# Altium PCB newae_pcbtemplate.PcbDoc
Units mil, origin at the board's own origin, x right, y up, seen from the top; angles counter-clockwise.
Board outline 2055 x 2540 mil, 2 copper layers (Top Layer, Bottom Layer); 22 components, 30 nets, 162 pads, 93 vias.
Unrouted connection lines stored in the file: 1.
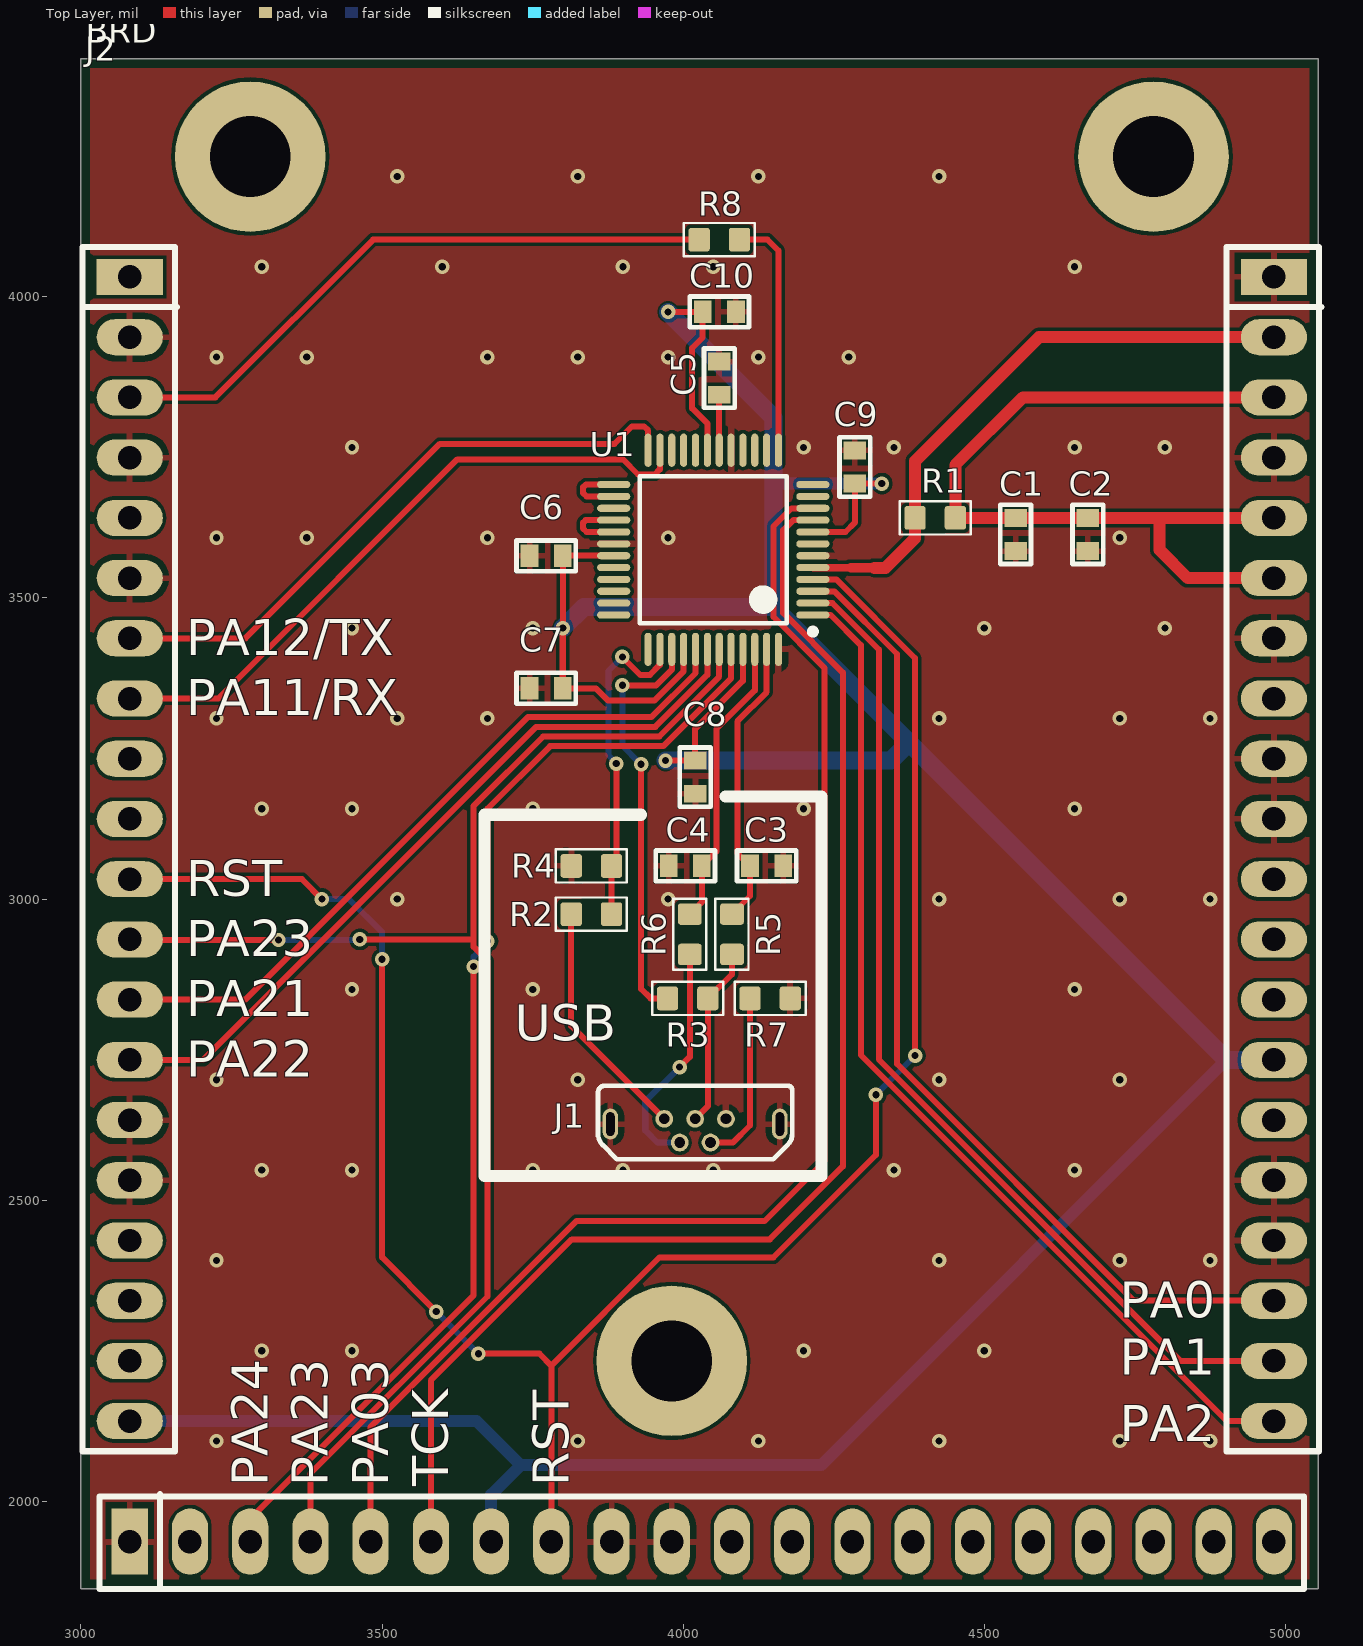
[diagram p0: Top Layer view]
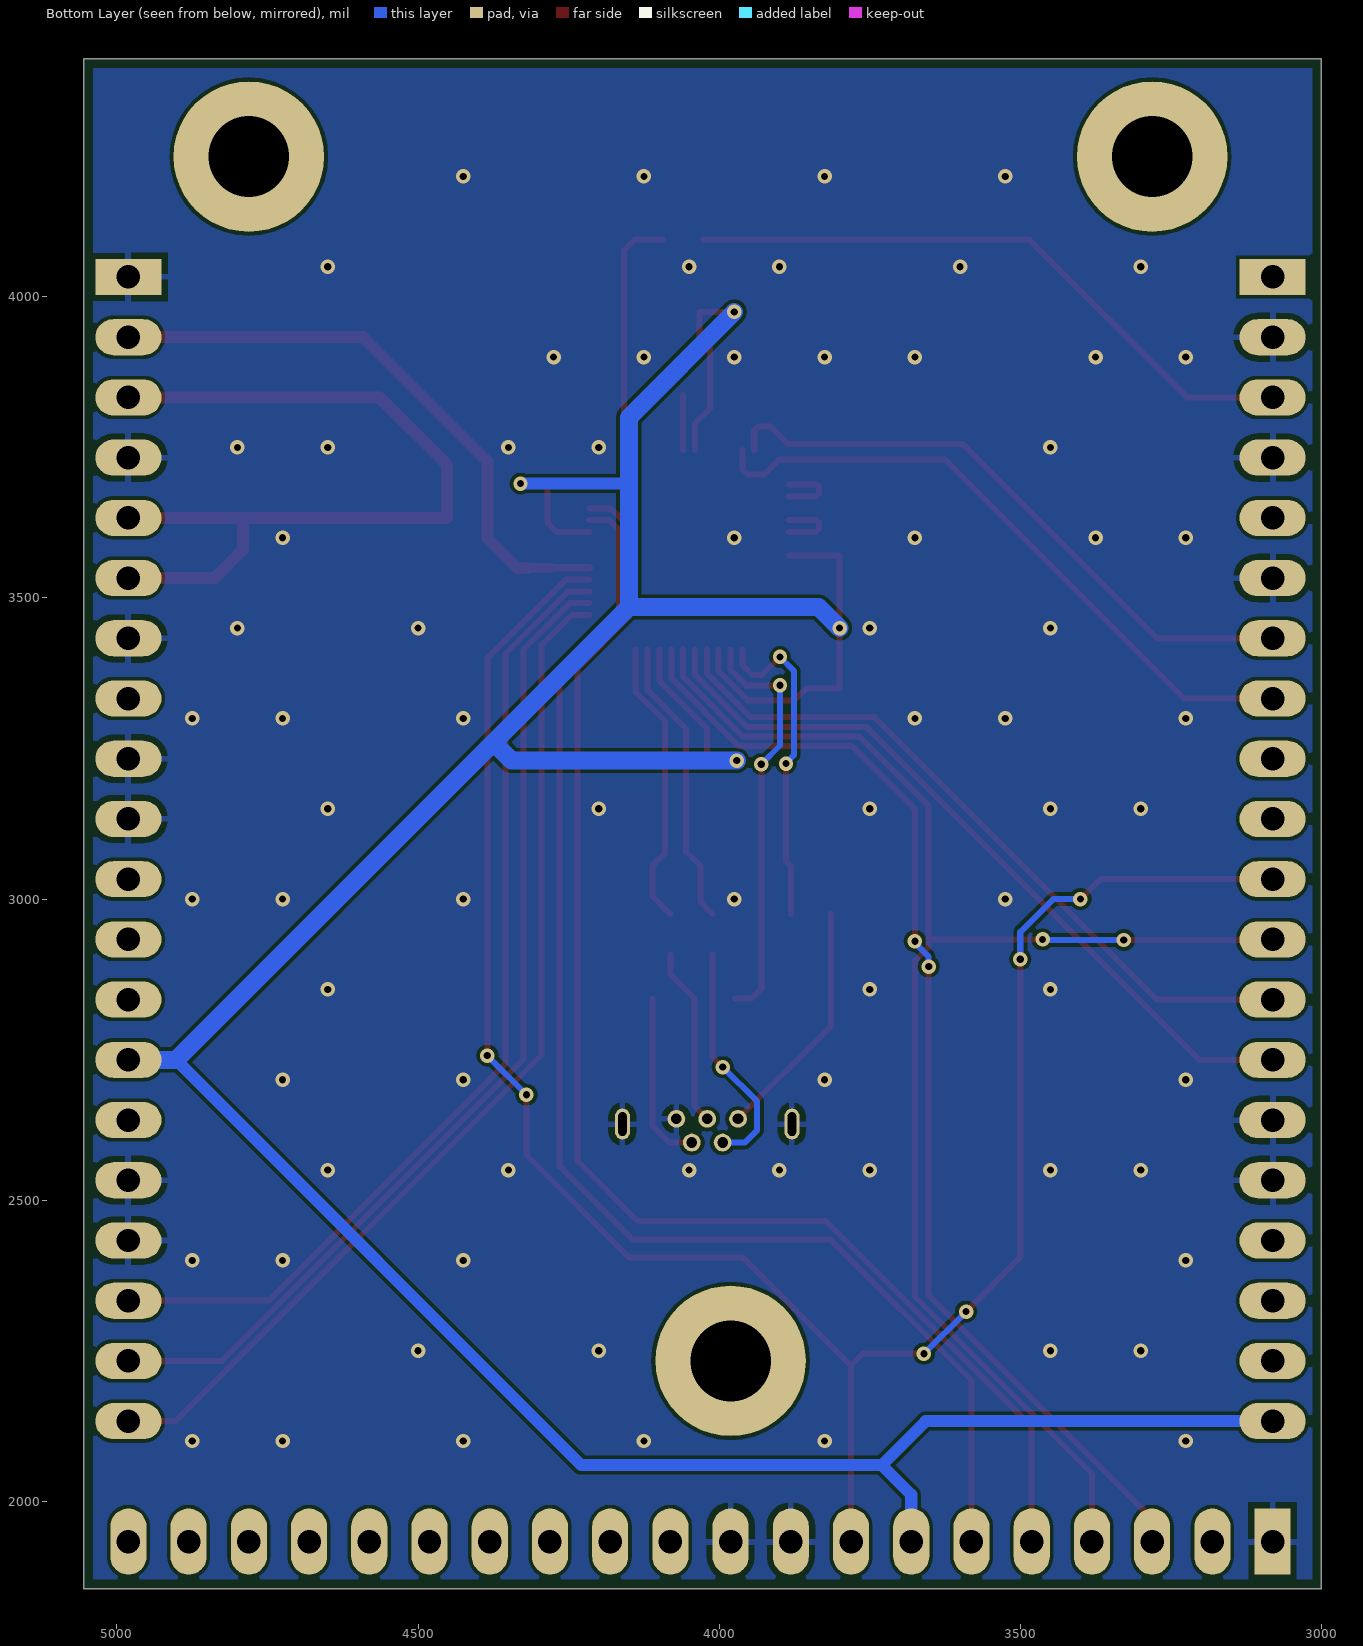
[diagram p1: Bottom Layer view, seen from below]

## Layer stack, top to bottom
Top Solder: solder mask 0.4, Solder Resist, Dk 3.5
Top Layer: signal copper 1.4
Dielectric 1: dielectric 12.6, FR-4, Dk 4.8
Bottom Layer: signal copper 1.4
Bottom Solder: solder mask 0.4, Solder Resist, Dk 3.5

## Board outline
3000,1855 5055,1855 5055,4395 3000,4395

## Design rules (kind name [scope] priority, off if disabled: settings)
BoardOutlineClearance [All] p1: gap=15 ignorepadtopadclearanceinfootprint=FALSE except(0: Arc-SplitContinuation Track-SplitContinuation SMDPad-SplitContinuation THPad-SplitContinuation Via-SplitContinuation Fill-SplitContinuation Poly-SplitContinuation Region-SplitContinuation Text-SplitContinuation)
Clearance [All] p1: gap=6 ignorepadtopadclearanceinfootprint=FALSE except(0: Arc-Hole Track-Hole SMDPad-Hole THPad-Hole Via-Hole Fill-Hole Poly-Hole Region-Hole Text-Hole)
HoleSize [All] p1: absolutevalues=TRUE maxlimit=200 minlimit=1 maxpercent=80.000 minpercent=20.000
MinimumSolderMaskSliver [All] p1: minsoldermaskwidth=5
PlaneConnect PlaneConnect_viaDirect [IsVia] p1: planeconnectstyle=Direct reliefexpansion=20 reliefentries=4 reliefconductorwidth=10 reliefairgap=10
PlaneConnect [All] p2: planeconnectstyle=Relief reliefexpansion=20 reliefentries=4 reliefconductorwidth=10 reliefairgap=10
PolygonConnect PolygonConnect_viaDirect [All vs isVia] p1: connectstyle=Direct reliefconductorwidth=10 reliefentries=4 polygonreliefangle="90 Angle" airgapwidth=10
PolygonConnect [All] p2: connectstyle=Relief reliefconductorwidth=10 reliefentries=4 polygonreliefangle="90 Angle" airgapwidth=10
RoutingVias [All] p1: holewidth=28 width=50 viastyle="Through Hole" minholewidth=28 minwidth=50 maxholewidth=28 maxwidth=50 useviatemplates=TRUE viatemplateguid#1={6D840749-F907-4D16-8989-C3B63D66B6A2} viatemplateguid#2={698B4A5D-BA78-483D-BBA4-95D6EA621E6A} viatemplateguid#3={FD094B6F-365A-486E-9523-000277BBDB43} viatemplatename#1=v61h30m0mx0 viatemplatename#2=v86h41m0mx0 viatemplatename#3=v127h71m0mx0
SilkToSilkClearance [All] p1: silktosilkclearance=5
SilkToSolderMaskClearance [IsPad] p1: minsilkscreentomaskgap=5 clearancetoexposedcopper=TRUE
SolderMaskExpansion [All] p1: expansion=4
Width Width_Power [(InNet('3v3') OR InNet('SHUNTH') OR InNet('SHUNTL'))] p1: maxlimit=40 minlimit=8 preferedwidth=30
Width [All] p2: maxlimit=100 minlimit=6 preferedwidth=8 minimp=50.000000 maximp=50.000000 favimp=50.000000
25 further rules are at their usual default settings.

## Classes and differential pairs
component class CW308T_SAM4L_UFO: J2

## Components (designator, comment, footprint, x,y, rotation, side; value= is the part's Value field where it differs from the comment)
BRD "CW308_TBRDSIZE" CW308T_TBOARD_DEFSIZE 3000,1850 r0 top locked
C1 "100n" CAPC0603_M 4552,3605.44 r270 top
C2 "2u2" CAPC0603_M 4672,3605.44 r270 top
C3 "47p" CAPC0603_M 4138.56,3055 r0 top
C4 "47p" CAPC0603_M 4003.44,3055 r180 top
C5 "100n" CAPC0603_M 4060,3865 r90 top
C6 "100n" CAPC0603_M 3772.56,3570 r180 top
C7 "100n" CAPC0603_M 3772.44,3350 r180 top
C8 "100n" CAPC0603_M 4020,3202.44 r270 top
C9 "100n" CAPC0603_M 4285,3717.44 r90 top
C10 "100n" CAPC0603_M 4060,3975 r0 top
J1 "614105150721" 614105150721 3968.64,2635 r0 top
J2 "CW308_TARGETCON" CW308_TBOARD_CONN 3081,4033 r0 top locked
R1 "10R" RESC1608X55N 4418.54,3633 r0 top
R2 "47k" RESC1608X55N 3847.54,2975 r0 top
R3 "1k5" RESC1608X55N 4007.54,2835 r180 top
R4 "68k" RESC1608X55N 3847.54,3055 r180 top
R5 "33R" RESC1608X55N 4081,2941.54 r270 top
R6 "33R" RESC1608X55N 4011,2941.54 r90 top
R7 "1k5" RESC1608X55N 4144.46,2835 r0 top
R8 "47R" RESC1608X55N 4060,4095 r180 top
U1 "ATSAM4LC2AA-AU" TSQFP50P900X900X120-48N 4050,3580 r180 top

## Footprints (in the part's own frame and the unit in brackets; to place one, negate y for a bottom-side part, rotate by r counter-clockwise, add the part's x,y. Pads: shape width x height; smd on the part's side, far side on the other; paste and mask are expansions set on the pad)
614105150721 [mm] "Upright USB"
  round 0.75 hole 0.45: 1(0,0) 2(0.65,-1) 3(1.3,0) 4(1.95,-1) 5(2.6,0)
  rrect100% 0.65x1.3 hole 0.35 slot 1 at 90 deg: S1(-2.275,-0.22) S2(4.875,-0.22)
  silkscreen extent -2.8,-1.7 5.4,1.4, body extent -2.7,-1.6 5.3,1.3, height 5.66
CAPC0603_M [mm]
  rect 0.75x0.95 smd: 1(-0.7,0) 2(0.7,0)
  silkscreen extent -1.25,-0.65 1.25,0.65, body extent -0.85,-0.45 0.85,0.45, height 0.9
CW308_TBOARD_CONN [mil]
  rect 110x60 hole 39: A1(0,0) C1(1900,0)
  oval 110x60 hole 39: A2(0,-100) A3(0,-200) A4(0,-300) A5(0,-400) A6(0,-500) A7(0,-600) A8(0,-700) A9(0,-800) A10(0,-900) A11(0,-1000) A12(0,-1100) A13(0,-1200) A14(0,-1300) A15(0,-1400) A16(0,-1500) A17(0,-1600) A18(0,-1700) A19(0,-1800) A20(0,-1900) C2(1900,-100) C3(1900,-200) C4(1900,-300) C5(1900,-400) C6(1900,-500) C7(1900,-600) C8(1900,-700) C9(1900,-800) C10(1900,-900) C11(1900,-1000) C12(1900,-1100) C13(1900,-1200) C14(1900,-1300) C15(1900,-1400) C16(1900,-1500) C17(1900,-1600) C18(1900,-1700) C19(1900,-1800) C20(1900,-1900)
  rect 60x110 hole 39: B1(0,-2100)
  oval 60x110 hole 39: B2(100,-2100) B3(200,-2100) B4(300,-2100) B5(400,-2100) B6(500,-2100) B7(600,-2100) B8(700,-2100) B9(800,-2100) B10(900,-2100) B11(1000,-2100) B12(1100,-2100) B13(1200,-2100) B14(1300,-2100) B15(1400,-2100) B16(1500,-2100) B17(1600,-2100) B18(1700,-2100) B19(1800,-2100) B20(1900,-2100)
  round 250 hole 134: MH1(200,200) MH2(900,-1800) MH2(1700,200)
  silkscreen extent -79,-2179 1979,50, body extent -50,-2149 1950,50, height 48
CW308T_TBOARD_DEFSIZE [mil] "Default CW308T Board Size"
  body extent 80,2523 90,2538, height 1
RESC1608X55N [mm] "Chip Resistor, Body 1.6x0.8mm, EIA 0603, IPC Medium Density"
  round 0.254 on Mech15: 0(0,0)
  rrect25% 0.9x1 smd: 1(-0.85,0) 2(0.85,0)
  Top Layer pour cut-out: -0.6,0.5 -0.4,0.7 0.4,0.7 0.6,0.5 0.6,-0.5 0.4,-0.7 -0.4,-0.7 -0.6,-0.5
  silkscreen extent -1.5,-0.7 1.5,0.7, body extent -0.87,-0.47 0.88,0.48, height 0.54
TSQFP50P900X900X120-48N [mm] "TSQFP, 48-Leads, Body 7.00x7.00mm, Pitch 0.50mm, IPC Medium Density"
  oval 1.4x0.3 smd: 1(-4.2,2.75) 2(-4.2,2.25) 3(-4.2,1.75) 4(-4.2,1.25) 5(-4.2,0.75) 6(-4.2,0.25) 7(-4.2,-0.25) 8(-4.2,-0.75) 9(-4.2,-1.25) 10(-4.2,-1.75) 11(-4.2,-2.25) 12(-4.2,-2.75) 25(4.2,-2.75) 26(4.2,-2.25) 27(4.2,-1.75) 28(4.2,-1.25) 29(4.2,-0.75) 30(4.2,-0.25) 31(4.2,0.25) 32(4.2,0.75) 33(4.2,1.25) 34(4.2,1.75) 35(4.2,2.25) 36(4.2,2.75)
  oval 0.3x1.4 smd: 13(-2.75,-4.2) 14(-2.25,-4.2) 15(-1.75,-4.2) 16(-1.25,-4.2) 17(-0.75,-4.2) 18(-0.25,-4.2) 19(0.25,-4.2) 20(0.75,-4.2) 21(1.25,-4.2) 22(1.75,-4.2) 23(2.25,-4.2) 24(2.75,-4.2) 37(2.75,4.2) 38(2.25,4.2) 39(1.75,4.2) 40(1.25,4.2) 41(0.75,4.2) 42(0.25,4.2) 43(-0.25,4.2) 44(-0.75,4.2) 45(-1.25,4.2) 46(-1.75,4.2) 47(-2.25,4.2) 48(-2.75,4.2)
  silkscreen extent -4.33,-3.1 3.1,3.57, body extent -4.5,-4.5 4.5,4.5, height 1.2

## Part data
BRD: library part CW308T_BRDSHAPE_DEFAULT, "308T Board Outline (Layer 1)", Component Group=Mechanical, Component Type=Mechanical, Part Number=CW308T_BRDSHAPE_DEFAULT
C1 C5 C6 C7 C8 C9 C10: library part CCHIP-100n-0603, "100n, 0603", Case-EIA=0603, Case-Metric=1608, Manufacture 1=Kemet, Manufacture Part Number 1=C0603C104K5RACTU, Rated Voltage=50V, Supplier Part Number 1=399-5089-2-ND, Component Group=Capacitor, Component Type=Standard, Mounting Technology=SMT, Part Number=CCHIP-100n-0603, Pin Count=2, Supplier 1=Digi-Key
C2: library part CCHIP-2u2-0603, "2u2, 0603", Case-EIA=0603, Case-Metric=1608, Manufacture 1=Samsung, Manufacture Part Number 1=CL10B225KP8NNNC, Supplier Part Number 1=1276-1134-2-ND, Component Group=Capacitor, Component Type=Standard, Mounting Technology=SMT, Part Number=CCHIP-2u2-0603, Pin Count=2, Supplier 1=Digi-Key
C3 C4: library part CCHIP-47p-0603, "47p, 0603", Case-EIA=0603, Case-Metric=1608, Component Group=Capacitor, Component Type=Standard, Mounting Technology=SMT, Part Number=CCHIP-47p-0603, Pin Count=2
J1: "USB, 5-pin, Upright", Manufacture 1="Wurth Electronics", Supplier Part Number 1=732-5958-1-ND, Component Group=Connector, Component Type=Standard, Manufacture Part Number 1=614105150721, Mounting Technology=Through-hole, Part Number=614105150721, Pin Count=7, PP Material Stack=0, PP Rotation=0, RoHS=Yes, Supplier 1=Digi-Key
J2: library part CW308_TBOARD, "CW308 \"Standard\" Target Board Connector", Component Group=Mechanical, Component Type=Standard, Mounting Technology=Through-hole, Part Number=CW308_TBOARD, Pin Count=60, Pitch=2.54mm
R1: library part RCHIP-10R-0603, "10R res, 0603, 1%, 1/10W", Case-EIA=0603, Case-Metric=1608, Manufacture 1=Yageo, Manufacture Part Number 1=RC0603FR-0710RL, Rated Power=0.1W, Rated Voltage=75VDC, Supplier Part Number 1=311-10.0HRCT-ND, Temperature Range="-55C to 155C", Tolerance=1%, Component Group=Resistor, Component Type=Standard, Mounting Technology=SMT, Part Number=RCHIP-10R-0603, Pin Count=2, Supplier 1=Digi-Key
R2: library part RCHIP-47K-0603, "47k res, 0603, 1%, 1/10W", Case-EIA=0603, Case-Metric=1608, Manufacture 1=Yageo, Manufacture Part Number 1=RC0603FR-0747KL, Rated Power=0.1W, Rated Voltage=75VDC, Supplier Part Number 1=311-47.0KHRCT-ND, Temperature Range="-55C to 155C", Tolerance=1%, Component Group=Resistor, Component Type=Standard, Mounting Technology=SMT, Part Number=RCHIP-47K-0603, Pin Count=2, Supplier 1=Digi-Key
R3 R7: library part RCHIP-1K5-0603, "1k5 res, 0603, 1%, 1/10W", Case-EIA=0603, Case-Metric=1608, Manufacture 1=Yageo, Manufacture Part Number 1=RC0603FR-071K5L, Rated Power=0.1W, Rated Voltage=75VDC, Supplier Part Number 1=311-1.50KHRCT-ND, Temperature Range="-55C to 155C", Tolerance=1%, Component Group=Resistor, Component Type=Standard, Mounting Technology=SMT, Part Number=RCHIP-1K5-0603, Pin Count=2, Supplier 1=Digi-Key
R4: library part RCHIP-68K-0603, "68k res, 0603, 1%, 1/10W", Case-EIA=0603, Case-Metric=1608, Manufacture 1=Yageo, Manufacture Part Number 1=RC0603FR-0768KL, Rated Power=0.1W, Rated Voltage=75VDC, Supplier Part Number 1=311-68.0KHRCT-ND, Temperature Range="-55C to 155C", Tolerance=1%, Component Group=Resistor, Component Type=Standard, Mounting Technology=SMT, Part Number=RCHIP-68K-0603, Pin Count=2, Supplier 1=Digi-Key
R5 R6: library part RCHIP-33R-0603, "33R res, 0603, 1%, 1/10W", Case-EIA=0603, Case-Metric=1608, Manufacture 1=Yageo, Manufacture Part Number 1=RC0603FR-0733RL, Rated Power=0.1W, Rated Voltage=75VDC, Supplier Part Number 1=311-33.0HRCT-ND, Temperature Range="-55C to 155C", Tolerance=1%, Component Group=Resistor, Component Type=Standard, Mounting Technology=SMT, Part Number=RCHIP-33R-0603, Pin Count=2, Supplier 1=Digi-Key
R8: library part RCHIP-47R-0603, "47R res, 0603, 1%, 1/10W", Case-EIA=0603, Case-Metric=1608, Manufacture 1=Yageo, Manufacture Part Number 1=RC0603FR-0747RL, Rated Power=0.1W, Rated Voltage=75VDC, Supplier Part Number 1=311-47.0HRCT-ND, Temperature Range="-55C to 155C", Tolerance=1%, Component Group=Resistor, Component Type=Standard, Mounting Technology=SMT, Part Number=RCHIP-47R-0603, Pin Count=2, Supplier 1=Digi-Key
U1: "Atmel, SAM4L, 48-TQFP", Manufacture 1=Atmel, Supplier Part Number 1=ATSAM4LC2AA-AU-ND, Component Group="Digital IC", Component Type=Standard, Manufacture Part Number 1=ATSAM4LC2AA-AU, Mounting Technology=SMT, Part Number=ATSAM4LC2AA-AU, Pin Count=48, Pitch=0.5mm, RoHS=Yes, Supplier 1=Digi-Key

## Via types
v1: diameter 24, hole 12, Top Layer to Bottom Layer, tented both sides, 93 vias

## Nets (pads, with @x,y where several pads share a name; then routed paths per layer and width w, separated by ;. In a path a pad name is that pad's centre, name@x,y a point inside that pad or via, vN(x,y) a via of type N, cw(c..) or ccw(c..) an arc to the next point about the centre after c; other vN are vias at no path point)
3v3: C6.1 C7.1 C8.1 C9.1 C10.1 J2.A20 J2.B7 J2.C14 U1.8 U1.19 U1.31 U1.40 U1.45 | length 6270.9
  Top Layer w10: U1.31 3800.28,3570.16 C6.1 3800.12,3450.12 v1(3800,3450) C7.1 3855,3350 3875,3330 3952.63,3330 4000.79,3378.16 U1.40 ; v1(3970.67,3230) C8.1 4020,3283 4099.21,3362.21 U1.45 ; v1(3975,3975) C10.1 4032.44,3932.44 4015,3915 4015,3815 4040.16,3789.84 U1.19 ; U1.8 4269.53,3609.53 4285,3625 C9.1 v1(4329.88,3689.88)
  Bottom Layer w20: J2.A20 3657,2133 3730,2060 ; J2.B7 3681,2011 3730,2060 ; 4150,3690 4150.12,3689.88 v1(4329.88,3689.88) ; 4902,2733 4229,2060 3730,2060
  Bottom Layer w30: v1(3800,3450) 3835,3485 4150,3485 ; v1(3970.67,3230) 4345,3230 4375,3260 ; v1(3975,3975) 4150,3800 4150,3690 4150,3485 ; J2.C14 4902,2733 4375,3260 ; 4150,3485 4375,3260
+5: J1.1 R2.1 | length 404
  Top Layer w10: R2.1 3814.07,2789.57 J1.1
CLKIN: J2.A3 R8.2 | length 1054.1
  Top Layer w10: J2.A3 3223,3833 3485,4095 R8.2
D+: J1.3 R3.1 R5.2 | length 298.4
  Top Layer w10: J1.3 4041,2656.18 R3.1 4081,2875 R5.2
D-: J1.2 R6.1 | length 388.4
  Top Layer w10: v1(3994,2721) 4011,2738 R6.1
  Bottom Layer w10: v1(3994,2721) 3937,2664 3937,2616 3957.37,2595.63 J1.2
GND: C1.2 C2.2 C3.2 C4.2 C5.2 C6.2 C7.2 C8.2 C9.2 C10.2 J1.5 J1.S1 J1.S2 J2.A2 J2.A4 J2.A6 J2.A15 J2.A16 J2.B1 J2.B9 J2.B10 J2.C1 J2.C4 J2.C7 J2.C9 J2.C10 J2.C16 J2.C17 R4.2 R7.2 U1.6 U1.17 U1.30 U1.48
  other v1: 3225,2100 3825,2100 4125,2100 4425,2100 4725,2100 4875,2100 3300,2250 3450,2250 4200,2250 4500,2250 3225,2400 4425,2400 4725,2400 4875,2400 3300,2550 3450,2550 3750,2550 3900,2550 4050,2550 4350,2550 4650,2550 3225,2700 3825,2700 4425,2700 4725,2700 3450,2850 3750,2850 4650,2850 3525,3000 3975,3000 4425,3000 4725,3000 4875,3000 3300,3150 3450,3150 3750,3150 4200,3150 4650,3150 3225,3300 3525,3300 3675,3300 4425,3300 4725,3300 4875,3300 3450,3450 3750,3450 4500,3450 4800,3450 3225,3600 3375,3600 3675,3600 3975,3600 4725,3600 3450,3750 4200,3750 4350,3750 4650,3750 4800,3750 3225,3900 3375,3900 3675,3900 3825,3900 3975,3900 4125,3900 4275,3900 3300,4050 3600,4050 3900,4050 4050,4050 4650,4050 3525,4200 3825,4200 4125,4200 4425,4200
ID: J1.4 R7.1 | length 288.3
  Top Layer w10: J1.4 4082.63,2595.63 4111,2624 R7.1
MISO: J2.A13 U1.41 | length 1203.5
  Top Layer w10: J2.A13 3273,2833 3742,3302 3947.25,3302 4020.47,3375.22 U1.41
MOSI: J2.A14 U1.42 | length 1266.3
  Top Layer w10: J2.A14 3203,2733 3756,3286 3953.88,3286 4040.16,3372.28 U1.42
NetC5_1: C5.1 U1.18 | length 92.2
  Top Layer w10: U1.18 4059.84,3837.28 C5.1
NetJ2_C8: J2.C8 J2.C12
NetR8_1: R8.1 U1.13 | length 403.7
  Top Layer w10: R8.1 4140,4095 4158.27,4076.73 U1.13
NetU1_25: U1.25 U1.26 | length 115.3
  Top Layer w10: U1.26 3839.42,3668.58 3834,3674 3834,3684 3838.27,3688.27 U1.25
NetU1_28: U1.28 U1.29 | length 115.3
  Top Layer w10: U1.29 3839.47,3609.53 3834,3615 3834,3625 3838.21,3629.21 U1.28
PA0: J2.C18 U1.3 | length 1652.4
  Top Layer w10: U1.3 4250.86,3511.1 4355,3406.96 4355,2726.25 4748.25,2333 J2.C18
PA1: J2.C19 U1.2 | length 1685.6
  Top Layer w10: U1.2 4247.91,3491.42 4325,3414.33 4325,2733.63 4825.63,2233 J2.C19
PA2: J2.C20 U1.1 | length 1718.9
  Top Layer w10: U1.1 4244.97,3471.73 4295,3421.7 4295,2741 4903,2133 J2.C20
PA19: R2.2 R4.1 U1.38 | length 553.3
  Top Layer w10: R2.2 R4.1 3889,3063 v1(3889,3225) ; v1(3899,3402) 3929,3372 3944.65,3372 3961.42,3388.77 U1.38
  Bottom Layer w10: v1@3890,3225 3876,3239 3876,3379 v1(3899,3402)
PA20: R3.2 U1.39 | length 692.6
  Top Layer w10: v1(3899,3355) 3955,3355 3981.1,3381.1 U1.39 ; v1(3930,3224) 3930,2851 3946,2835 R3.2
  Bottom Layer w10: v1(3899,3355) 3899,3255 v1@3929,3225
RST: J2.A11 J2.B8 U1.4 | length 3402.8
  Top Layer w10: J2.A11 3367,3033 v1(3400,3000) ; v1(3500,2900) 3500,2405 v1(3590,2315) ; v1(3660,2245) 3761.33,2245 3781,2225.33 ; J2.B8 3781,2225.33 ; U1.4 4254.21,3530.79 4385,3400 v1(4385,2740) ; v1(4320,2675) 4320,2575 4150,2405 3960.67,2405 3781,2225.33
  Bottom Layer w10: v1(3400,3000) 3445,3000 3500,2945 v1(3500,2900) ; v1(3590,2315) v1(3660,2245) ; v1(4320,2675) v1(4385,2740)
SHUNTH: C1.1 C2.1 J2.C3 J2.C5 J2.C6 R1.2 | length 1454.9
  Top Layer w20: J2.C6 4838,3533 4791,3580 4791,3633 ; J2.C5 4791,3633 ; J2.C3 4564,3833 4452,3721 R1.2 C1.1 C2.1 4791,3633
SHUNTL: J2.C2 R1.1 U1.5 | length 999.5
  Top Layer w12: U1.5 4215.83,3550 4278,3550
  Top Layer w16: 4278,3550 4318,3550
  Top Layer w20: 4318,3550 4336,3550 4385.07,3599.07 R1.1 4385.07,3727.07 4591,3933 J2.C2
TCK: J2.B6 U1.9 | length 2252.6
  Top Layer w10: J2.B6 3581,2200.75 3815.25,2435 4144,2435 4265,2556 4265,3376.1 4166,3475.1 4166,3612.42 4182.8,3629.21 U1.9
TDI: J2.B3 U1.44 | length 1925
  Top Layer w10: J2.B3 3281,1971 3652,2342 v1(3652,2887.95) v1@3649.58,2887.95 ; v1(3675,2930) 3675,3150 3779,3254 3967.14,3254 4079.53,3366.39 U1.44
  Bottom Layer w10: v1(3652,2887.95) 3652,2904.47 3675,2927.47 v1(3675,2930)
TDO/SCK: J2.A12 J2.B4 U1.43 | length 2467.7
  Top Layer w10: J2.A12 3082,2932 v1(3328,2932) ; J2.B4 3381,2046 3675,2340 3675,2897.47 3652,2920.47 3652,2935 ; v1(3463,2933) 3650,2933 3652,2935 ; U1.43 4059.84,3369.33 3960.51,3270 3767.37,3270 3652,3154.63 3652,2935
  Bottom Layer w10: v1(3328,2932) 3462,2932 v1(3463,2933)
TMS: J2.B5 U1.10 | length 2294.3
  Top Layer w10: J2.B5 3481,2123.37 3822.63,2465 4135,2465 4235,2565 4235,3383.47 4150,3468.47 4150,3619.04 4179.85,3648.9 U1.10
USART_RX: J2.A8 U1.23 | length 1090.5
  Top Layer w10: J2.A8 3228,3333 3625,3730 3900,3730 3925,3705 3952.83,3705 3961.42,3713.58 U1.23
USART_TX: J2.A7 U1.24 | length 1042.2
  Top Layer w10: J2.A7 3273,3433 3596,3756 3886,3756 3915,3785 3935,3785 3941.73,3778.27 U1.24
USB_N: C4.1 R6.2 U1.46 | length 484.3
  Top Layer w10: R6.2 4031,2995 C4.1 4055,3079 4055,3282.63 4118.9,3346.53 U1.46
USB_P: C3.1 R5.1 U1.47 | length 480.9
  Top Layer w10: R5.1 4111,3005 C3.1 4090,3076 4090,3295 4138.58,3343.58 U1.47
pads on no net: J2.A1 J2.A5 J2.A9 J2.A10 J2.A17 J2.A18 J2.A19 J2.B2 J2.B11 J2.B12 J2.B13 J2.B14 J2.B15 J2.B16 J2.B17 J2.B18 J2.B19 J2.B20 J2.C11 J2.C13 J2.C15 J2.MH1 J2.MH2 R1.0 R2.0 R3.0 R4.0 R5.0 R6.0 R7.0 R8.0 U1.7 U1.11 U1.12 U1.14 U1.15 U1.16 U1.20 U1.21 U1.22 U1.27 U1.32 U1.33 U1.34 U1.35 U1.36 U1.37

## Polygon pours and split planes (outlines as drawn)
GND on Top Layer "GND_L01_P000" (solid, remove dead copper, pour order 0): 3000,4400 5050,4400 5050,1860 3000,1860
GND on Bottom Layer "GND_L02_P002" (solid, remove dead copper, pour order 2): 3000,4400 5060,4400 5060,1860 5050,1850 3000,1850

## Silkscreen, mask and mechanical layers (free items; w line width, h text height)
Top Overlay:
  lines w20: 3930,3140 3670,3140 3670,2540 4230,2540 4230,3170 4070,3170
  text "PA12/TX" at 3175,3405 h60
  text "PA11/RX" at 3175,3305 h60
  text "RST" at 3175,3005 h60
  text "PA23" at 3175,2905 h60
  text "PA21" at 3175,2805 h60
  text "USB" at 3720,2765 h60
  text "PA22" at 3175,2705 h60
  text "PA0" at 4725,2305 h60
  text "PA1" at 4725,2210 h60
  text "PA2" at 4725,2100 h60
  text "PA24" at 3310,2025 h60 r90
  text "PA23" at 3410,2025 h60 r90
  text "PA03" at 3510,2025 h60 r90
  text "TCK" at 3610,2025 h60 r90
  text "RST" at 3810,2025 h60 r90